# Altium PCB EC_meter.PcbDoc
Units mil, origin at the board's own origin, x right, y up, seen from the top; angles counter-clockwise.
Board outline 1527.44 x 1310.33 mil, 2 copper layers (Top Layer, Bottom Layer); 32 components, 15 nets, 94 pads, 31 vias.
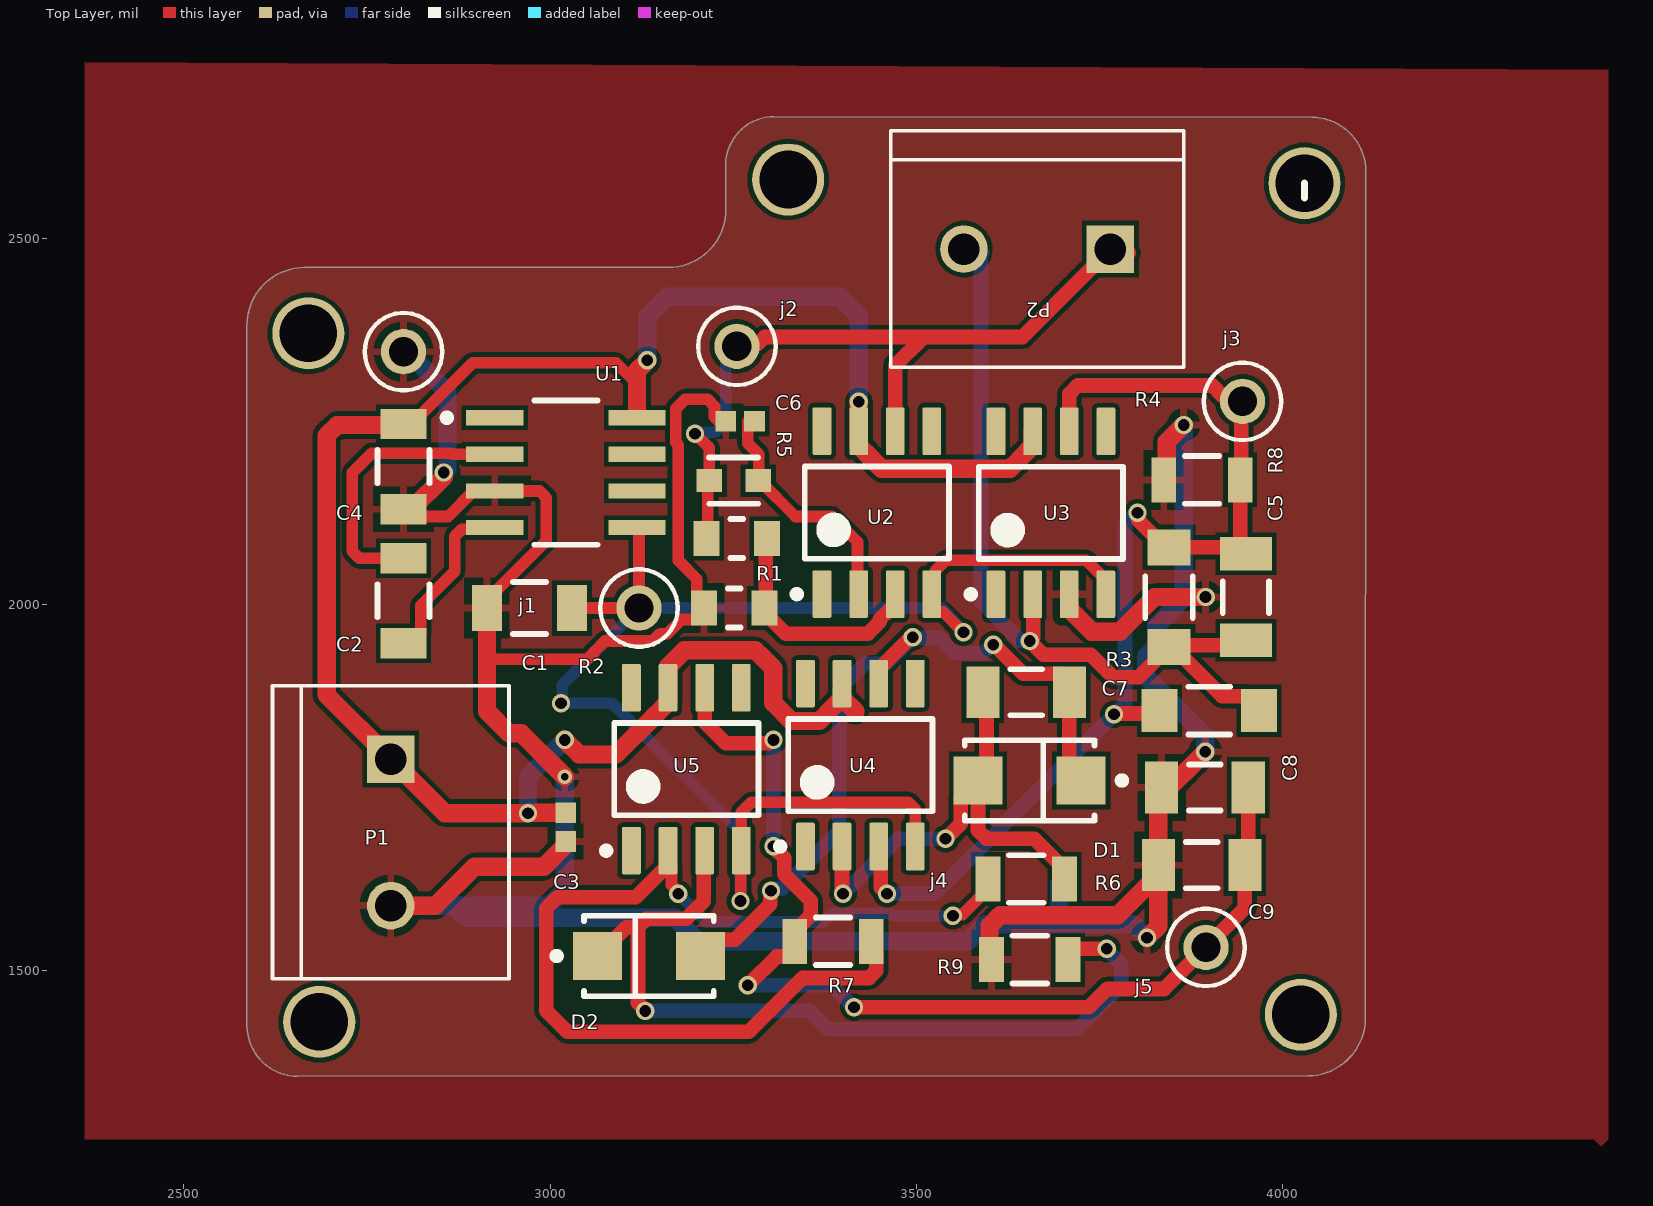
[diagram p0: Top Layer view]
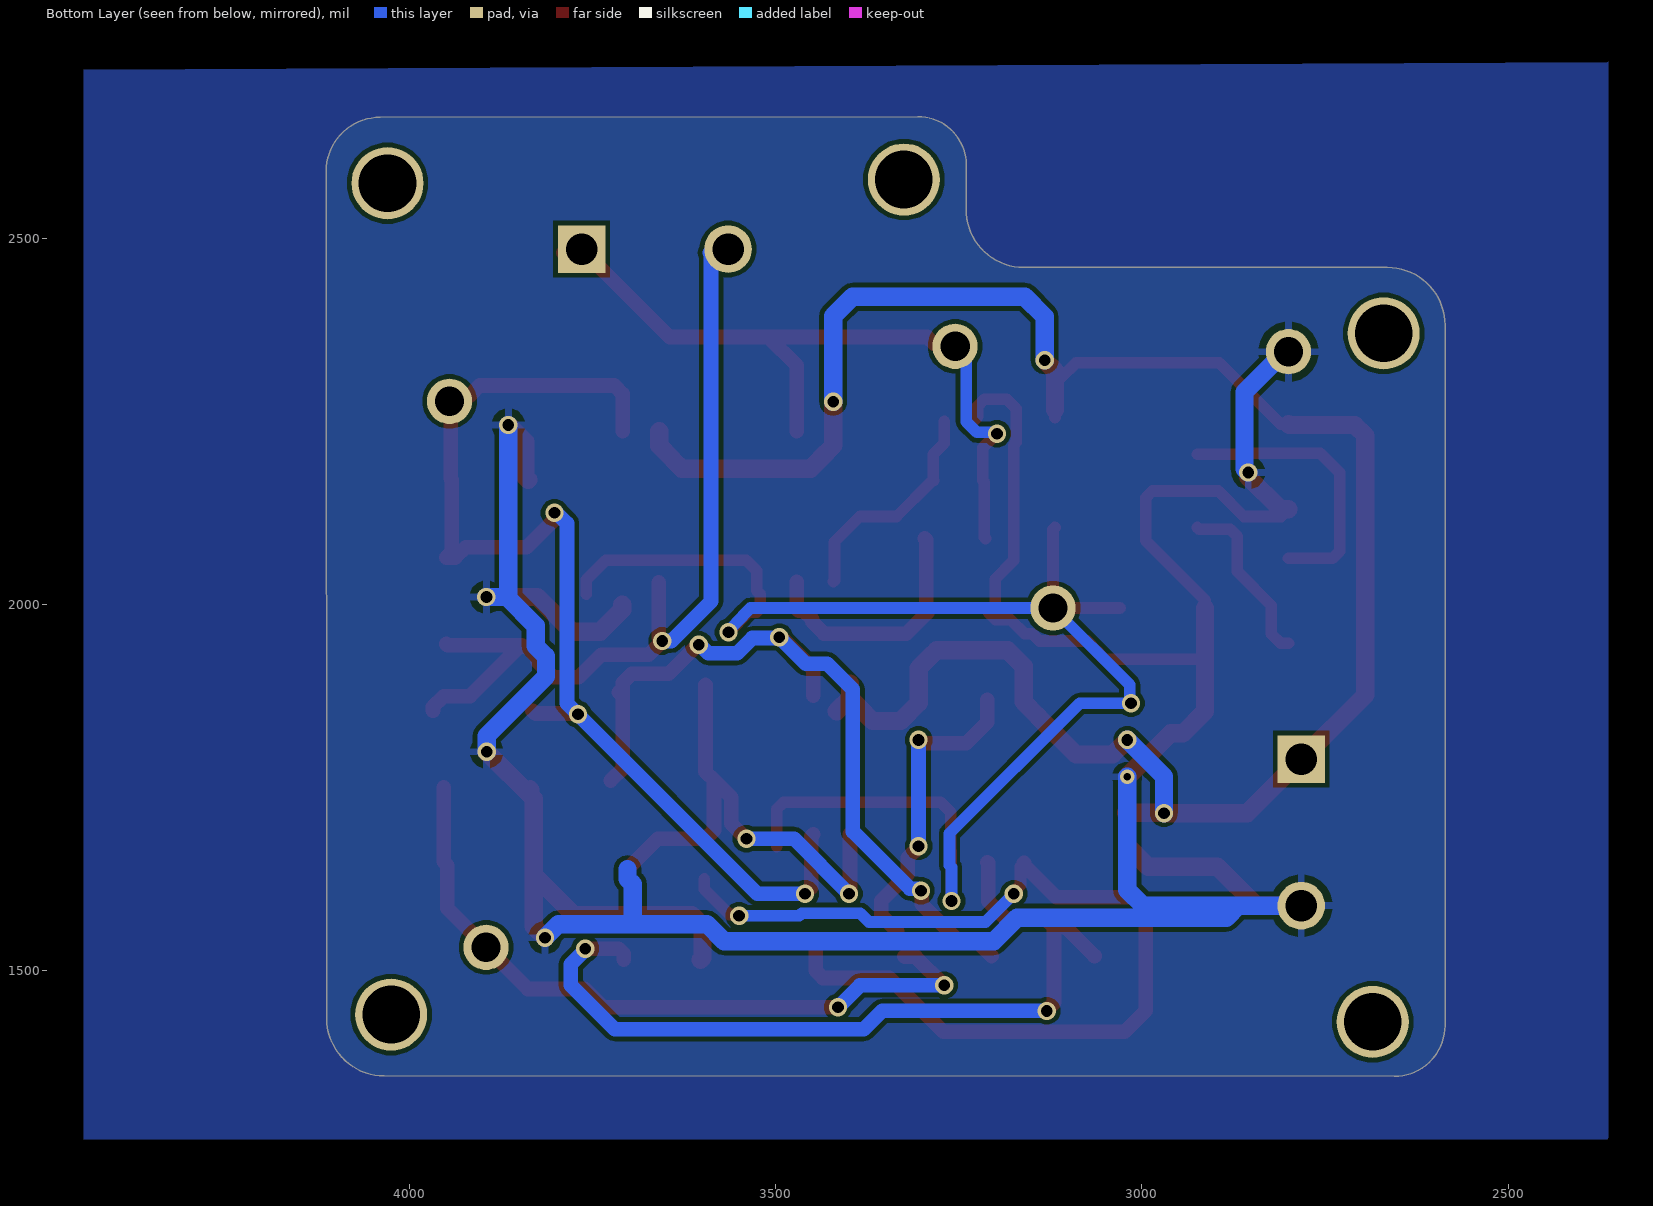
[diagram p1: Bottom Layer view, seen from below]
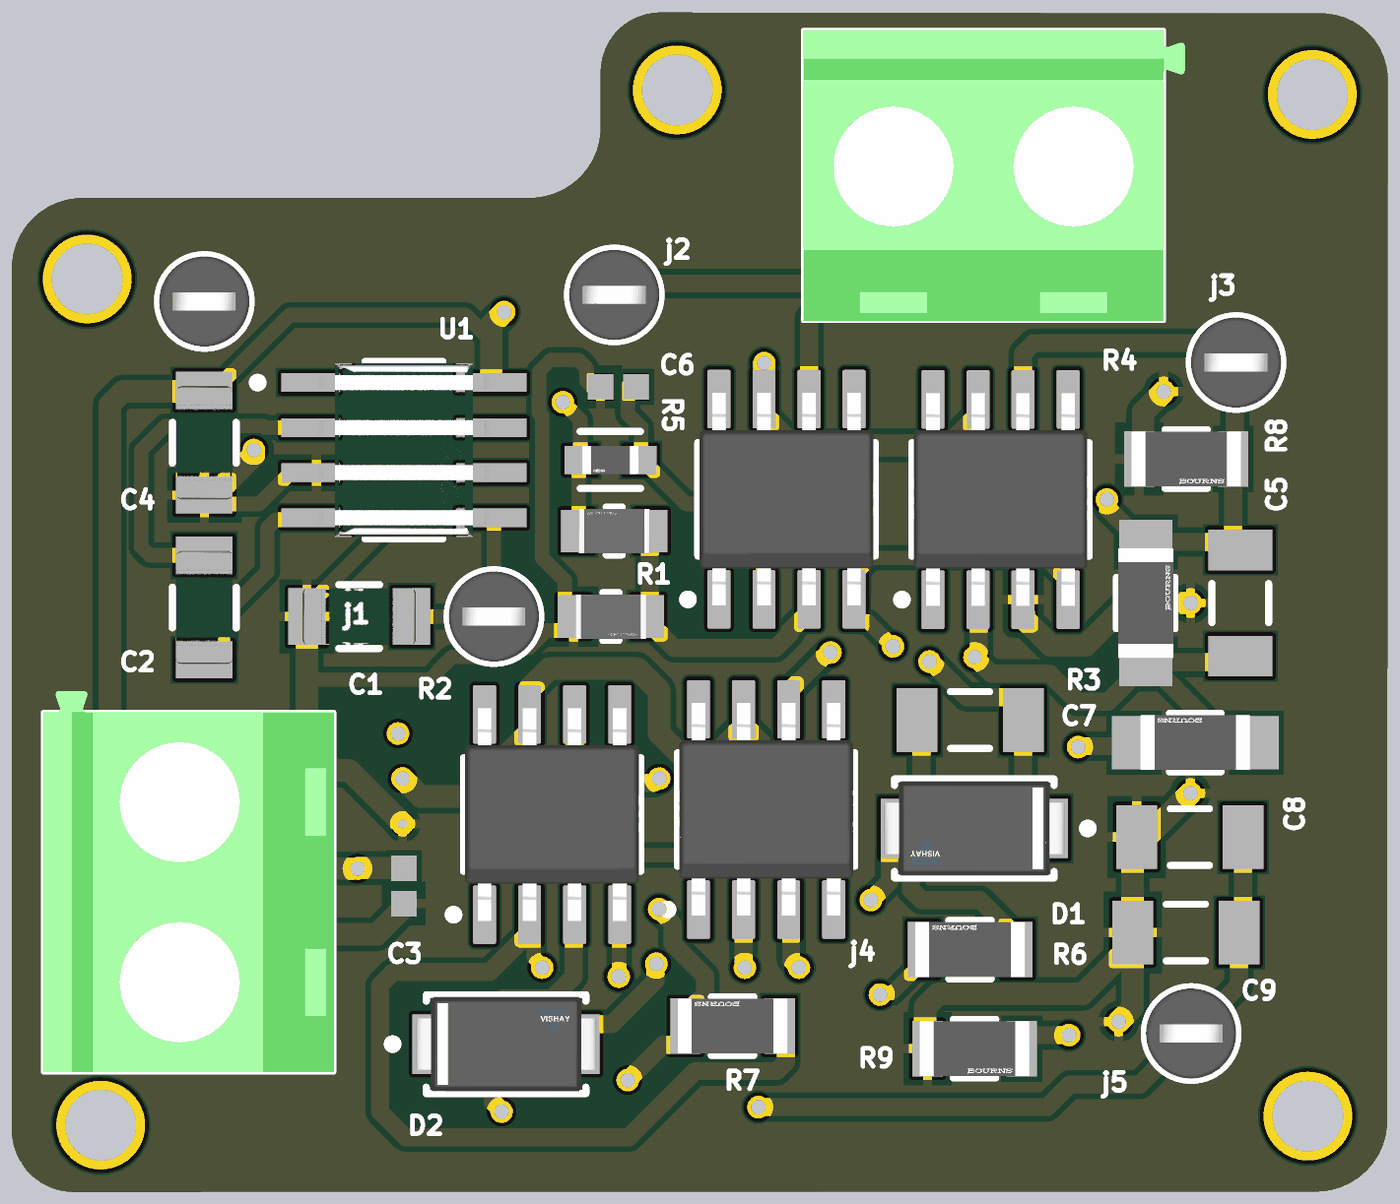
[diagram p2: 3D render of the assembled board from above, using the file's embedded part models]

## Layer stack, top to bottom
Top Solder: solder mask 0.4, Solder Resist, Dk 3.5
Top Layer: signal copper 1.4
Dielectric 1: dielectric 12.6, FR-4, Dk 4.8
Bottom Layer: signal copper 1.4
Bottom Solder: solder mask 0.4, Solder Resist, Dk 3.5

## Board outline
2586.26,1425 2586.26,2381.26 cw(c2665,2381.26) 2665,2460 3161.11,2460 3161.27,2460.16 ccw(c3161.27,2538.9) 3240,2539.88 3240,2600 cw(c3306.04,2600) 3306.04,2666.04 4040,2665 cw(c4040,2591.3) 4113.7,2591.3 4113.11,1435 cw(c4034.37,1435) 4034.37,1356.26 4036.26,1356.26 2655.55,1355.71 cw(c2655.55,1425)

## Design rules (kind name [scope] priority, off if disabled: settings)
Clearance Clearance_1 [All] p1 off: gap=10 ignorepadtopadclearanceinfootprint=FALSE
Clearance [All] p2: gap=6 ignorepadtopadclearanceinfootprint=FALSE
MinimumSolderMaskSliver [All] p1: minsoldermaskwidth=6
PolygonConnect [All] p1: connectstyle=Relief reliefconductorwidth=10 reliefentries=4 polygonreliefangle="90 Angle" airgapwidth=10
RoutingVias RoutingVias_1 [All] p1 off: holewidth=28 width=50 viastyle="Through Hole" minholewidth=28 minwidth=50 maxholewidth=28 maxwidth=50
RoutingVias [All] p2: holewidth=10 width=20 viastyle="Through Hole" minholewidth=6 minwidth=6 maxholewidth=28 maxwidth=50
SilkToSilkClearance SilkToSilkClearance_1 [All] p1 off: silktosilkclearance=10
SilkToSilkClearance [All] p2: silktosilkclearance=6
SilkToSolderMaskClearance [IsPad] p1: minsilkscreentomaskgap=6 clearancetoexposedcopper=TRUE
SolderMaskExpansion [All] p1: expansion=4 istentingtop=FALSE
SupplyNets "Schematic Supply Nets_1" [InNet('GND')] p1: voltage=0.000
SupplyNets "Schematic Supply Nets" [InNet('VCC')] p2: voltage=0.000
Width Width_1 [All] p1 off: maxlimit=10 minlimit=10 preferedwidth=10
Width [All] p2: maxlimit=60 minlimit=6 preferedwidth=10 minimp=50.000000 maximp=50.000000 favimp=50.000000
27 further rules are at their usual default settings.

## Classes and differential pairs
component class EC_meter_: C1 C2 C5 C8 C9 D1 D2 j1 j2 j3 j4 j5 P1 P2 R1 R2 R4 R5 R6 R7 R8 R9 U1 U2 U3 U4 U5

## Components (designator, comment, footprint, x,y, rotation, side; value= is the part's Value field where it differs from the comment)
C1 "10uF" FP-GRM31-0_2-MFG 2971.93,1995 r180 top value=10uF
C2 "10uF" FP-GRM31-0_2-MFG 2800,2005 r270 top value=10uF
C3 "CAP 10nF 16V 0402(1005)" CAPC0402(1005)60_M#1 3021.38,1695.84 r90 top value=10nF
C4 "10uF" FP-GRM31-0_2-MFG 2800,2188.07 r270 top value=10uF
C5 "CAP 1pF 100V 1206(3216)" CAPC1206(3216)170_N 3950,2010 r270 top value=1pF
C6 "CAP 10nF 16V 0402(1005)" CAPC0402(1005)60_M#2 3259.56,2250 r0 top value=10nF
C7 "CAP 1pF 100V 1206(3216)" CAPC1206(3216)170_N 3650,1880 r180 top value=1pF
C8 "CAP 1pF 100V 1206(3216)" CAPC1206(3216)170_N 3894.06,1750 r0 top value=1pF
C9 "CAP 1pF 100V 1206(3216)" CAPC1206(3216)170_N 3889.58,1643.93 r0 top value=1pF
D1 "S1M-E3/5AT" FP-95400-MFG 3654.72,1759.6 r180 top value=12pF
D2 "S1M-E3/5AT" FP-95400-MFG 3135,1520 r0 top value=12pF
j1 "5001" FP-5001-MFG 3121.5,1995 r0 top
j2 "5001" FP-5001-MFG 3255.11,2352.32 r0 top
j3 "5001" FP-5001-MFG 3945.31,2277.17 r0 top
j4 "5001" FP-5001-MFG 2800,2345 r0 top
j5 "5001" FP-5001-MFG 3895.43,1531.77 r0 top
P1 "TERMINAL_BLOCKS" "PCBComponent_1 - duplicate" 2784.97,1648.44 r270 top
P2 "TERMINAL_BLOCKS" "PCBComponent_1 - duplicate" 3624.74,2482.58 r180 top
R1 "AC0805FR-0710KL" FP-AC0805-MFG 3255,2090 r180 top value=10KΩ
R2 "AC0805FR-0710KL" FP-AC0805-MFG 3251.38,1995 r0 top value=10KΩ
R3 "CR1206-FX-3300ELF" FP-CR1206-MFG 3900,1855 r180 top
R4 "CR1206-FX-3300ELF" FP-CR1206-MFG 3845,2010 r90 top
R5 "RT0603BRD0730KL" FP-RT0603-0_55-MFG 3250.82,2168.85 r180 top
R6 "CR1206-JW-102ELF" FP-CR1206-IPC_C#1 3650,1625 r180 top
R7 "CR1206-JW-102ELF" FP-CR1206-IPC_C#1 3386.41,1540 r180 top
R8 "CR1206-JW-102ELF" FP-CR1206-IPC_C#2 3890,2170 r0 top
R9 "CR1206-JW-102ELF" FP-CR1206-IPC_C#3 3655,1515 r0 top
U1 "ICL7662EBA+T" FP-S8-4-MFG 3021.61,2179.85 r0 top
U2 "OPA343UA" D0008A_M 3446.3,2125.28 r90 top
U3 "OPA343UA" D0008A_M 3683.86,2124.99 r90 top
U4 "OPA343UA" D0008A_M 3423.66,1780.68 r90 top
U5 "OPA343UA" D0008A_M 3186.1,1775.04 r90 top

## Footprints (in the part's own frame and the unit in brackets; to place one, negate y for a bottom-side part, rotate by r counter-clockwise, add the part's x,y. Pads: shape width x height; smd on the part's side, far side on the other; paste and mask are expansions set on the pad)
CAPC0402(1005)60_M#1 [mm] "Chip Capacitor, Body 1.0x0.5mm, Height 0.6mm, IPC Low Density"
  rect 0.72x0.72 smd mask+0: 1(-0.5,0) 2(0.5,0)
  body extent -0.55,-0.3 0.55,0.3, height 0.6
CAPC0402(1005)60_M#2 [mm] "Chip Capacitor, Body 1.0x0.5mm, Height 0.6mm, IPC Low Density"
  rect 0.72x0.72 smd mask+0.025: 1(-0.5,0) 2(0.5,0)
  body extent -0.55,-0.3 0.55,0.3, height 0.6
CAPC1206(3216)170_N [mm] "Chip Capacitor, Body 3.2x1.6mm, Height 1.7mm, IPC Medium Density"
  rect 1.15x1.8 smd: 1(-1.5,0) 2(1.5,0)
  silkscreen extent -0.55,-0.8 0.55,0.8, body extent -1.7,-0.9 1.7,0.9, height 1.7
D0008A_M [mm] "SOIC, 8-Leads, Body 5x4mm, Pitch 1.27mm, IPC Low Density"
  rrect15% 1.65x0.65 smd: 1(-2.825,1.905) 2(-2.825,0.635) 3(-2.825,-0.635) 4(-2.825,-1.905) 5(2.825,-1.905) 6(2.825,-0.635) 7(2.825,0.635) 8(2.825,1.905)
  silkscreen extent -2.95,-2.5 1.6,2.9, body extent -3,-2.45 3,2.45, height 1.63
FP-5001-MFG [mm]
  round 1.57 hole 1.016 paste-2539.97 mask+0: 1(0,0)
  silkscreen extent -1.35,-1.34 1.35,1.34, body extent -1.45,-1.45 1.45,1.45, height 0.25
FP-95400-MFG [mm]
  rect 1.7x1.68 smd paste+0: 1(-1.79,0) 2(1.79,0)
  silkscreen extent -3.33,-1.4 2.25,1.4, body extent -2.74,-1.5 2.74,1.5, height 0.25
FP-AC0805-MFG [mm]
  rect 0.9x1.2 smd paste+0: 1(-1.05,0) 2(1.05,0)
  silkscreen extent -0.23,-0.67 0.23,0.67, body extent -1.6,-0.77 1.6,0.77, height 0.25
FP-CR1206-IPC_C#1 [mil]
  rect 33.79x61.5 smd paste+0: 1(-52.24,0) 2(52.24,0)
  silkscreen extent -24,-32 24,32, body extent -73,-36 73,36, height 10
FP-CR1206-IPC_C#2 [mil]
  rect 33.79x61.5 smd paste+0 mask+0: 1(-52.24,0) 2(52.24,0)
  silkscreen extent -24,-32 24,32, body extent -73,-36 73,36, height 10
FP-CR1206-IPC_C#3 [mil]
  rect 33.79x61.5 smd paste+0: 1(-52.24,0)
  rect 33.79x61.5 smd paste+0 mask+0: 2(52.24,0)
  silkscreen extent -24,-32 24,32, body extent -73,-36 73,36, height 10
FP-CR1206-MFG [mm]
  rect 1.25x1.5 smd paste+0 mask+0: 1(-1.725,0) 2(1.725,0)
  silkscreen extent -0.72,-0.82 0.72,0.82, body extent -2.45,-0.92 2.45,0.92, height 0.25
FP-GRM31-0_2-MFG [mm]
  rect 1.05x1.6 smd paste+0: 1(-1.475,0) 2(1.475,0)
  silkscreen extent -0.58,-0.9 0.58,0.9, body extent -2.1,-1 2.1,1, height 0.25
FP-RT0603-0_55-MFG [mm]
  rect 0.9x0.8 smd paste+0: 1(-0.85,0) 2(0.85,0)
  silkscreen extent -0.85,-0.81 0.86,0.8, body extent -1.4,-0.55 1.4,0.55, height 0.25
FP-S8-4-MFG [mm]
  rect 1.98x0.53 smd paste+0: 1(-2.465,1.905) 2(-2.465,0.635) 3(-2.465,-0.635) 4(-2.465,-1.905) 5(2.465,-1.905) 6(2.465,-0.635) 7(2.465,0.635) 8(2.465,1.905)
  silkscreen extent -4.25,-2.5 1.1,2.5, body extent -3.55,-2.75 3.55,2.75, height 0.25
"PCBComponent_1 - duplicate" [mm]
  rect 1.65x1.65 / inner round 1.65 / far side rect 1.65x1.65 hole 1.1: 1(-3.563,-0.061)
  round 1.65 hole 1.1: 2(1.517,-0.061)
  silkscreen extent -6.1,-4.16 4.06,4.04, body extent -6.7,-4.16 4.06,4.04, height 10

## Part data
C1 C2 C4: library part CMP-2000-05256-2, "CAP CER 10UF 50V X5R 1206", Capacitance=10uF, Manufacturer="Murata Electronics North America", Manufacturer Part Number=GRM31CR61H106KA12L, Package=GRM31-0.2, Temperature="-55°C to +85°C", Temperature Characteristic=X5R, Temperature Coefficient=15%, Temperature Range High=+85°C, Temperature Range Low=-55°C, Tolerance=10%, Voltage Rating=50V, Automotive=No, Category=Cap, ComponentLink2Description=Datasheet, ComponentLink2URL=https://search.murata.co.jp/Ceramy/image/img/A01X/G101/ENG/GRM31CR61H106KA12-01A.pdf, Device Class L1="Passive Components", Device Class L2=Capacitors, Device Class L3="Ceramic Capacitors", Digikey Description="CAP CER 10UF 50V X5R 1206", Height=1.8mm, Lead Free=Yes, Material=Ceramic, Mouser Description="Multilayer Ceramic Capacitors MLCC - SMD/SMT 1206 10uF 50volt X5R +/-10%", Octopart=https://octopart.com/grm31cr61h106ka12l-murata-18903335, RoHS=TRUE
C3 C6: library part CMP-1034-01878-1, "CAP 10nF 16V -20% to +80% 0402 (1005 Metric) Thickness 0.6mm SMD", Case-EIA=0402, Case-Metric=1005, Rated Voltage="16 V", Tolerance="-20% to +80%", Max Thickness="0.6 mm", Technology=SMT
C5 C7 C8 C9: library part CMP-1037-00028-1, "CAP 1pF 100V ±0.25pF 1206 (3216 Metric) Thickness 1.7mm SMD", Case-EIA=1206, Case-Metric=3216, Rated Voltage="100 V", Tolerance=Â±0.25pF, Max Thickness="1.7 mm", Technology=SMT
D1 D2: library part CMP-02540-000018-1, "DIODE GEN PURP 1KV 1A DO214AC", Capacitance=12pF, Forward Current=1A, Manufacturer=Vishay, Max Junction Temp=+150°C, Max Repetitive Reverse Voltage=1000V, Max Surge Forward Current=30A, Package=95400, Peak Reverse Current=5uA, Temperature="-55°C to +150°C", Temperature Range Low=-55°C, Automotive=No, Category=Diode, ComponentLink2Description=Datasheet, ComponentLink2URL=http://www.vishay.com/docs/88711/s1.pdf, Device Class L1="Discrete Semiconductors", Device Class L2=Diodes, Device Class L3="Rectifier Diodes", Digikey Description="DIODE GEN PURP 1KV 1A DO214AC", Footprint Url=http://www.vishay.com/docs/95400/sma.pdf, Height=2.29mm, Lead Free=Yes, Manufacturer Part Number=S1M-E3/5AT, Mouser Description="Rectifiers 1.0 Amp 1000 Volt 30A IFSM @ 8.3ms", Octopart=https://octopart.com/s1m-e3%2F5at-vishay-42334588, RoHS=TRUE, Standoff Height=0mm, Temperature Range High=+150°C
j1 j2 j3 j4 j5: library part CMP-2000-05181-2, "PC TEST POINT MINIATURE BLACK", Color=Black, Flammability Rating="UL94 V-0", Package Quantity=100, Body Material=Bronze, Contact Material=Bronze, Contact Plating=Silver, Diameter=2.54mm, Height=0.3inch, Hole Diameter=1.6mm, Housing Color=Black, Inside Diameter=1.27mm, Insulation=Insulated, Insulation Material=Nylon, Lead Free="Lead Free", Length=7.62mm, Material=Nylon, Mount="Through Hole", Number of Contacts=1, Number of Ports=1, Orientation=Straight, Outside Diameter=2.54mm, Packaging=Bulk, Plating=Silver, REACH SVHC="No SVHC", RoHS Compliant=Yes, Series=THM, Termination="Through Hole"
R1 R2: library part CMP-2001-04480-2, "RES SMD 10K OHM 1% 1/8W 0805", Manufacturer=Yageo, Package=AC0805, Power Rating=1/8W, Resistance=10KΩ, Temperature="-55°C to +155°C", Temperature Range High=+155°C, Temperature Range Low=-55°C, Tolerance=0.01, Voltage Rating=150V, Automotive=Yes, Automotive Grade="Grade 0", Category=Res, ComponentLink2Description=Datasheet, ComponentLink2URL=http://www.yageo.com/documents/recent/PYu-AC_51_RoHS_L_6.pdf, Composition="Thick Film", Device Class L1="Passive Components", Device Class L2=Resistors, Device Class L3="Chip SMD Resistors", Digikey Description="RES SMD 10K OHM 1% 1/8W 0805", Footprint Url=http://www.yageo.com/exep/pages/download/literatures/PYu-R_Mount_10.pdf, Height=0.6mm, Ipc Land Pattern Name=RESC200125X50, Lead Free=Yes, Manufacturer Part Number=AC0805FR-0710KL, Mouser Description="Res Thick Film 0805 10K Ohm 1% 0.125W(1/8W) ±100ppm/C Epoxy Pad SMD Automotive T/R", Octopart=https://octopart.com/ac0805fr-0710kl-yageo-21711112, RoHS=TRUE, Series=AC
R3 R4: library part CMP-07231-003158-1, "Thick Film Chip Resistors 1206 330Ω 0.25W 1% 100ppm/°C", Case Code (Imperial)=1206, Case Code (Metric)=3216, Max Operating Temperature=155°C, Max Power Dissipation=250mW, Min Operating Temperature=-55°C, Package Quantity=5000, Resistance=330R, Temperature Coefficient=100ppm/°C, Tolerance=1%, Voltage Rating=200V, Case/Package=1206, Composition="Thick Film", Contact Plating=Tin, Depth=1.6mm, Height=0.6mm, Length=3.2mm, Military Standard=Not, Mount="Surface Mount", Number of Pins=2, Number of Terminations=2, Packaging="Tape and Reel", Power Rating=250mW, Radiation Hardening=No, REACH SVHC="No SVHC", Termination=SMD/SMT, Thickness=610um, Voltage Rating (DC)=200V, Width=1.6mm
R5: library part CMP-2000-04435-3, Case Code (Imperial)=0603, Case Code (Metric)=1608, Max Operating Temperature=125°C, Max Power Dissipation=100mW, Min Operating Temperature=-55°C, Resistance=30kΩ, Temperature Coefficient=25ppm/°C, Tolerance=0.1%, Voltage Rating=75V, Voltage Rating (DC)=50V, Case/Package=0603, Composition="Thin Film", Contact Plating=Tin, Depth=800µm, Features="Moisture Resistant", Height=550µm, Lead Free="Lead Free", Length=1.6mm, Military Standard=Not, NexarPartId=1243756, Number of Terminations=2, Power Rating=100mW, Radiation Hardening=No, RoHS=Compliant, Schedule B="8533210045, 8533210045", Termination=SMD/SMT, Weight=2.012816mg, Width=787.4µm
R6 R7 R8 R9: library part CMP-07231-001820-1, "Thick Film Chip Resistors 1206 1kΩ 0.25W 5% 200ppm/°C", Case Code (Imperial)=1206, Case Code (Metric)=3216, Max Operating Temperature=155°C, Min Operating Temperature=-55°C, Package Quantity=5000, Power Rating=250mW, Resistance=1kR, Temperature Coefficient=200ppm/°C, Tolerance=5%, Voltage Rating=200V, Case/Package=1206, Composition="Thick Film", Contact Plating=Tin, Depth=1.6mm, Height=0.6mm, Length=3.2mm, Military Standard=Not, Mount="Surface Mount", Number of Pins=2, Packaging="Tape and Reel", Radiation Hardening=No, REACH SVHC="No SVHC", Termination=SMD/SMT, Thickness=610um, Voltage Rating (DC)=200V, Width=1.6mm
U1: library part CMP-05722-000128-1, "IC REG CHARGE PUMP INV 8SOIC", Manufacturer=Maxim, Max Power Dissipation=500mW, Max Supply Voltage=20V, Min Supply Voltage=4.5V, Negative Voltage Available=true, Nominal Supply Current=20-250uA, Output Current=20mA, Output Voltage=-20/+40V, Package=S8-4, Switching Frequency=10kHz, Temperature="-40°C to +85°C", Temperature Range High=+85°C, Temperature Range Low=-40°C, Automotive=No, Category=IC, ComponentLink2Description=Datasheet, ComponentLink2URL=https://datasheets.maximintegrated.com/en/ds/ICL7662-Si7661.pdf, Device Class L1="Integrated Circuits (ICs)", Device Class L2="Power Management ICs", Device Class L3="Voltage Regulators - Switching", Digikey Description="IC REG CHARGE PUMP INV 8SOIC", Footprint Url=https://pdfserv.maximintegrated.com/land_patterns/90-0096.PDF, Height=1.75mm, Lead Free=Yes, Manufacturer Part Number=ICL7662EBA+T, Mouser Description="Switching Voltage Regulators CMOS Voltage Converter", Number Of Outputs=1, Octopart=https://octopart.com/icl7662eba%2Bt-maxim+integrated-39621878, Output Type=Fixed, RoHS=TRUE, Standoff Height=0.1mm, Switching Topology="Charge Pump"
U2 U3 U4 U5: library part CMP-0272-00349-3, "Single-Supply, Rail-to-Rail Operational Amplifier MicroAmplifier(TM) Series, 2.5 to 5.5 V, -40 to 85 degC, 8-pin SOIC (D8), Green (RoHS & no Sb/Br)", Manufacturer="Texas Instruments", Rating=Catalog, Total Supply Voltage(Max)(+5V is 5, +/-5V is 10)=5.5, Total Supply Voltage(Min)(+5V is 5, +/-5V is 10)=2.5, CMRR(Min)(dB)=74, Code_JEDEC=MS-012, ComponentLink1Description="Manufacturer URL", ComponentLink1URL=http://www.ti.com/, ComponentLink2Description=Datasheet, ComponentLink2URL=http://www.ti.com/lit/ds/symlink/opa343.pdf, ComponentLink3Description="Package Specification", ComponentLink3URL=http://www.ti.com/litv/pdf/msoi002j, DatasheetVersion=SBOS090A, Eco-Plan="Green (RoHS & no Sb/Br)", GBW(Typ)(MHz)=5.5, IIB(Max)(pA)=10, Iq per channel(Max)(mA)=1.25, Mounting Technology="Surface Mount", Number of Channels=1, Offset Drift(Typ)(uV/C)=3, PackageDescription="8-Pin Plastic Small Outline, Body 4.9 x 3.9 mm, Pitch 1.27 mm", PackageReference=D0008A, PackageVersion="4040047-3/M, 06/2011", Packing=TUBE, PartNumber=OPA343UA, Slew Rate(Typ)(V/us)=6, Sub Family="High Output Current Amplifier (>=50mA), Low Input Bias Current Amp (<=10pA), Low Supply Voltage Amplifier (<=2.7V), Precision Amplifier", Vio (25C)(Max)(mV)=8

## Free pads (board coordinates)
  round 98.43 hole 78.74: 4(2670,2370) 5(2685,1430) 6(4025,1440) 7(3325,2580) 7(4030,2575)

## Via types
v1: diameter 25, hole 16, Top Layer to Bottom Layer, 30 vias
v2: diameter 20, hole 10, Top Layer to Bottom Layer, 1 vias

## Nets (pads, with @x,y where several pads share a name; then routed paths per layer and width w, separated by ;. In a path a pad name is that pad's centre, name@x,y a point inside that pad or via, vN(x,y) a via of type N, cw(c..) or ccw(c..) an arc to the next point about the centre after c; other vN are vias at no path point)
-VCC: C1.1 j1.1 U1.5 U2.4 U3.4 U4.4 U5.4 | length 2049.8
  Top Layer w16: C1.1 j1.1 3121.5,2102.42 3119.06,2104.85 U1.5 ; v1(3260,1595) 3260.55,1595.55 3260.55,1663.27 U5.4 3261.1,1716.1 3275,1730 3489.29,1730 3498.66,1720.63 U4.4 ; v1(3564.41,1961.9) 3536.72,1989.58 3526.09,1989.58 3521.3,1994.38 U2.4 3526.09,2018.86 3526.09,2046.09 3540.25,2060.25 3732.06,2060.25 3758.86,2033.45 U3.4
  Bottom Layer w16: v1(3260,1595) 3260,1640.99 3262.72,1643.72 3262.72,1687.28 3085,1865 v1(3015,1865) 3016.72,1866.72 3016.72,1890.23 j1.1 3534.58,1995 3545.89,1983.69 3545.89,1982.85 3564.41,1964.33 v1(3564.41,1961.9)
FB_OSC: C6.2 R5.1 U2.2 | length 312.5
  Top Layer w16: C6.2@3270,2250 3270,2220 3285,2205 3285,2169.56 R5.1 3286.25,2168.85 3335.1,2120 3385,2120 3419.84,2085.16 3419.84,2032.59 U2.2@3421.3,2031.13
GND: C1.2 C3.1 C4.2 C6.1 C8.1 C9.1 j4.1 P1.2 R2.1 R8.1 R9.1 U1.3 U3.3 | length 4855.3
  Top Layer w16: C4.2 2810,2120 2861.17,2120 2896.02,2154.85 U1.3 2985.63,2154.85 2995,2145.48 2995,2086.97 2913.86,2005.83 C1.2 ; 2913.86,1934.37 2923.23,1925 3050.63,1925 3060,1934.37 3060,1935 3075.09,1950.09 3140.1,1950.09 3150,1960 3160.32,1960 3179.7,1979.38 3200.32,1979.38 3210.04,1989.09 3200.32,1998.81 3200.32,2034.68 3175,2060 3175,2217.72 3171.46,2221.27 3171.46,2238.44 3171.64,2238.62 3171.64,2267.27 3184.37,2280 3215.08,2280 3224.46,2270.63 3224.46,2256.17 C6.1@3230.63,2250
  Top Layer w20: C8.1@3832.76,1734.64 3832.76,1736.87 3832.76,1747.76 C8.1
  Top Layer w25: P1.2 2843.7,1588.7 2896.85,1641.85 2991.54,1641.85 C3.1@3020,1670.32 ; C4.2 2810.83,2130 2855,2174.17 v1(2855,2180) ; C1.2 2913.86,1934.37 2913.86,1925 2913.86,1854.09 2943.97,1823.97 2960.8,1823.97 v2(3020.1,1764.67) ; R9.1 3600,1517.76 3600,1561.1 3614.64,1575.75 3775.13,1575.75 C9.1@3830.52,1631.14 ; U3.3@3709.55,1999.69 3709.55,1992.77 3739.52,1962.79 3778.19,1962.79 3825.4,2010 v1(3895,2010) ; v1(3815,1545) 3830.52,1560.52 C9.1@3830.52,1631.14 ; R8.1 3842.15,2174.39 3842.15,2222.15 v1(3865,2245) ; v1(3894.66,1798.77) 3832.76,1736.87 3830.52,1734.64 C9.1 C9.1@3830.52,1631.14
  Bottom Layer w25: P1.2 2868.45,1588.7 ; j4.1@2800,2350 2860,2290 2860,2185 v1(2855,2180) ; v2(3020.1,1764.67) 3020.1,1610.1 2998.7,1588.7 2868.45,1588.7 ; 3702.24,1638.86 3702.24,1625 3695.15,1617.91 3695.15,1563.5 ; v1(3815,1545) 3796.5,1563.5 3695.15,1563.5 ; 3865,2008.05 v1(3865,2245) ; v1(3894.66,1798.77) 3894.66,1820.34 3813.5,1901.5 3813.5,1929.03 3827.77,1943.29 3827.77,1970.82 3866.95,2010 v1(3895,2010) ; 2868.45,1588.7 2885,1572.15 3170.37,1572.15 3202.52,1540 3570.3,1540 3593.8,1563.5 3695.15,1563.5
IIN: C5.1 j3.1 R3.2 R4.2 R8.2 U3.6 U4.3 | length 1548.7
  Top Layer w20: U4.3@3448.66,1686.19 3451.46,1683.4 3451.46,1613.54 v1(3460,1605) ; U3.6 3708.86,2287.14 3720.57,2298.86 3903.83,2298.86 3917.52,2285.17 3937.31,2285.17 j3.1 3943.78,2275.63 3943.78,2171.54 R8.2 3942.24,2071.81 3950,2064.06 3937.2,2064.06 3923.35,2077.91 3840.08,2077.91 3802.93,2115.06 3802.93,2124.03 v1(3801.97,2124.99) ; v1(3770,1850) 3770.96,1850.96 3828.05,1850.96 R3.2
  Bottom Layer w20: v1(3460,1605) 3525,1605 3785,1865 3785,2110.77 3798.26,2124.03 3801.01,2124.03 v1(3801.97,2124.99)
NetC2_1: C2.1 U1.2 | length 387.7
  Top Layer w16: C2.1 2739.37,2063.07 2730,2072.44 2730,2180 2756.5,2206.5 2865.98,2206.5 2867.62,2204.85 U1.2
NetC2_2: C2.2 U1.4 | length 240.9
  Top Layer w16: C2.2 2810.83,1946.93 2823.5,1959.6 2823.5,1998.5 2870,2045 2870,2093.05 2879.37,2102.42 2922.13,2102.42 U1.4
NetC7_1: C7.1 D1.1 D2.2 U4.6 | length 1086
  Top Layer w20: D2.2 3227.53,1542.06 3252.37,1542.06 3300.84,1590.53 3300.84,1608.28 v1(3301.8,1609.24) ; U4.6@3448.66,1875.17 3448.66,1911.59 3491.12,1954.04 3494.04,1954.04 v1(3495,1955) ; v1(3605,1945) 3606.64,1945 3646.21,1905.43 3696.42,1905.43 3709.06,1892.8 C7.1 ; C7.1@3714.06,1880 3709.06,1875 3709.06,1775.74 D1.1
  Bottom Layer w20: v1(3301.8,1609.24) 3303.15,1609.24 3305.57,1611.66 3316.66,1611.66 3395,1690 3395,1884.22 3429.91,1919.13 3459.13,1919.13 v1(3495,1955) 3495.96,1954.04 3531.96,1954.04 3552.6,1933.4 3592.05,1933.4 3603.65,1945 v1(3605,1945)
NetC8_2: C8.2 C9.2 j5.1 R7.2 U5.6 | length 1427.7
  Top Layer w20: U5.6@3211.1,1869.53 3211.1,1839.01 3239.89,1810.22 3298.87,1810.22 3303.65,1815 v1(3305,1815) ; v1(3270,1480) 3309.25,1519.25 R7.2@3324.25,1519.25 ; v1(3305,1670) 3305,1668.65 3319.87,1653.78 3319.87,1631.48 3355.86,1595.48 3355.86,1575.55 3334.17,1553.86 R7.2 ; v1(3415,1450) 3735.59,1450 3760.59,1475 3838.66,1475 j5.1 3948.63,1584.97 C9.2 3953.11,1648.41 C8.2
  Bottom Layer w20: v1(3270,1480) 3384.9,1480 3414.9,1450 v1(3415,1450) ; v1(3305,1670) v1(3305,1815)
NetD2_1: D2.1 R9.2 U5.3 | length 1155.7
  Top Layer w20: D2.1 3064.92,1520 3104.22,1559.3 3120,1559.3 ; v1(3130,1445) 3130,1446.35 3120,1456.35 3120,1559.3 ; U5.3@3211.1,1648.08 3209.92,1646.89 3209.92,1594.92 3186.02,1571.02 3131.72,1571.02 3120,1559.3 ; R9.2 3707.24,1523.11 3714.14,1530 v1(3760,1530)
  Bottom Layer w20: v1(3130,1445) 3354.7,1445 3379.7,1420 3720,1420 3780,1480 3780,1508.65 3760,1528.65 v1(3760,1530)
NetR6_2: R6.2 R7.1 U5.2 | length 1395
  Top Layer w16: U5.2@3161.1,1647 3165.9,1642.2 3165.9,1616.54 3175,1607.44 v1(3175,1605) ; v1(3550,1575) 3551.72,1576.72 3563.34,1576.72 3597.76,1611.14 R6.2
  Top Layer w20: U5.2@3161.1,1647 3161.1,1644.14 3158.31,1641.34 3117.11,1600.15 3010.15,1600.15 2995,1585 2995,1445 3023.5,1416.5 3271.5,1416.5 3345,1490 3435.57,1490 3445.55,1499.98 3445.55,1533.11 R7.1
  Bottom Layer w16: v1(3175,1605) 3213.5,1566.5 3372.78,1566.5 3384.78,1578.5 3464.42,1578.5 3467.92,1575 v1(3550,1575)
NON_I_U2: R1.1 R2.2 U2.3 | length 343.4
  Top Layer w20: R2.2 3292.72,1989.09 3321.81,1960 3434.01,1960 3450.09,1976.08 3450.09,1979.41 3462.27,1991.58 3468.5,1991.58 3471.3,1994.38 U2.3@3471.3,2031.13 ; R2.2@3294.53,1996.81 3294.53,2088.19 R1.1
NON_I_U4: C7.2 D1.2 R6.1 U4.2 | length 707.8
  Top Layer w20: U4.2@3398.66,1686.19 3398.66,1606.34 v1(3400,1605) ; v1(3540,1680) 3560.79,1700.79 3560.79,1736.53 3583.86,1759.6 D1.2 ; C7.2@3595.94,1890 3595.94,1771.29 D1.2 ; R6.1 3702.24,1638.86 3661.1,1680 3595.97,1680 3584.25,1691.72 D1.2
  Bottom Layer w20: v1(3400,1605) 3475,1680 v1(3540,1680)
SC+: j2.1 P2.1 R1.2 R5.2 U2.6 | length 1036
  Top Layer w16: v1(3197.96,2233.11) 3217.35,2213.72 R5.2 3215.51,2167 3215.51,2091.85 R1.2
  Top Layer w20: j2.1@3239.75,2352.32 3242.57,2355.14 3283.07,2355.14 3292.93,2365 3510,2365 ; U2.6 3471.3,2326.3 3510,2365 ; P2.1 3645,2365 3510,2365 ; P2.1@3785,2475 P2.1@3790,2480
  Bottom Layer w16: v1(3197.96,2233.11) 3199.68,2234.83 3225.27,2234.83 3239.75,2249.31 j2.1@3239.75,2352.32
SC-: C5.2 P2.2 R3.1 R4.1 U3.2 | length 1146.5
  Top Layer w20: U3.2@3659.55,2029.81 3659.55,1954.55 v1(3655,1950) 3673.57,1931.43 3738.32,1931.43 3769.23,1900.53 3803.44,1900.53 3825.47,1922.56 3825.47,1927.48 3840.08,1942.09 R4.1 ; C5.2@3950,1945.94 3948.07,1944.02 3846.93,1944.02 R4.1 ; R3.1 3967.91,1859.92 3953.31,1874.53 3917.48,1874.53 3849.92,1942.09 R4.1
  Bottom Layer w20: P2.2@3590,2480 3588.28,2478.28 3588.28,2004.15 3642.43,1950 v1(3655,1950)
VCC: C3.2 C4.1 P1.1 U1.8 U2.7 U3.7 U4.7 U5.7 | length 2849.1
  Top Layer w16: C4.1 2810.83,2246.14 2894.68,2330 3090,2330 3109.85,2310.15 ; U1.8 3118.66,2265.29
  Top Layer w25: C4.1 2798.86,2245 2709.64,2245 2695,2230.36 2695,1876.26 P1.1 2856.26,1715 v1(2970,1715) 2970.53,1715.53 C3.2 ; v1(3020,1815) 3040,1795 3090.15,1795 3142.4,1847.24 3142.4,1847.87 3161.4,1866.87 3161.4,1915.36 3183.29,1937.24 3280.44,1937.24 3287.68,1930 3304.88,1912.8 3304.88,1865.37 3329.33,1840.92 3368,1840.92 3379.96,1852.88 3379.96,1853.51 U4.7@3398.66,1872.22 ; 3118.66,2265.29 3118.66,2318.95 v1(3132.88,2333.18) ; U4.7 U4.7@3398.66,1872.22 ; 3416.63,1854.24 U4.7@3398.66,1872.22 ; U2.7 3421.3,2216.82 3439.27,2198.85 3439.27,2198.22 3452.26,2185.23 3628.19,2185.23 3640.15,2197.19 3640.15,2197.82 3658.86,2216.53 U3.7 ; U2.7@3421.59,2236.21 v1(3421.59,2276.5)
  Bottom Layer w25: v1(2970,1715) 2970,1765 v1(3020,1815) ; v1(3132.88,2333.18) 3132.88,2392.88 3160,2420 3395,2420 3421.59,2393.41 v1(3421.59,2276.5)
pads on no net: U1.1 U1.6 U1.7 U2.1 U2.5 U2.8 U3.1 U3.5 U3.8 U4.1 U4.5 U4.8 U5.1 U5.5 U5.8

## Polygon pours and split planes (outlines as drawn)
GND on Bottom Layer "sw_plane" (solid, remove dead copper, pour order 2): 2363.12,2741.12 2363.12,1271.88 2365,1270 4445,1270 4445,2730 2365,2740
GND on Top Layer "sw_plane" (solid, remove dead copper, pour order 0): 2365,2740 2365,1270 4425,1270 4435,1260 4445,1270 4445,2730

## Silkscreen, mask and mechanical layers (free items; w line width, h text height)
Top Overlay:
  lines w10: 4030,2555 4030,2575